# Altium PCB FoxSky.TractorVCU.PcbDoc
Units mm, origin at the board's own origin, x right, y up, seen from the top; angles counter-clockwise.
Board outline 79.93 x 48.25 mm, 2 copper layers (Top Layer, Bottom Layer); 109 components, 49 nets, 280 pads, 0 vias.
Unrouted connection lines stored in the file: 214.
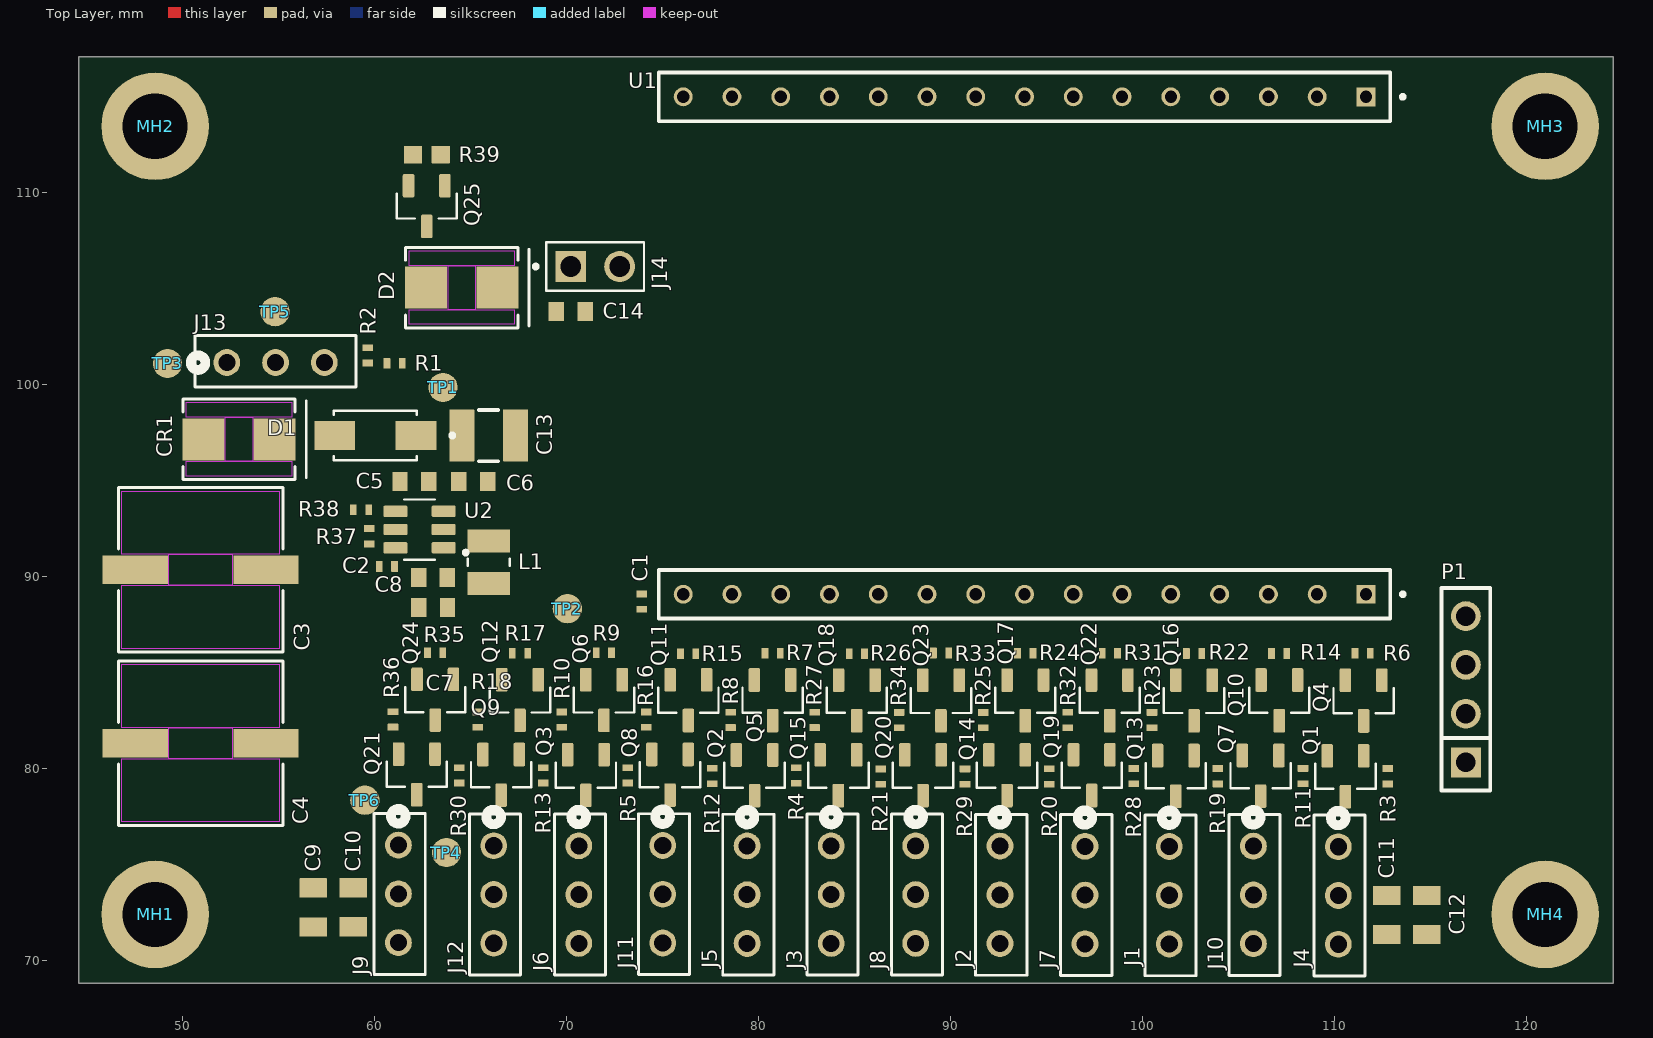
[diagram p0: Top Layer view]
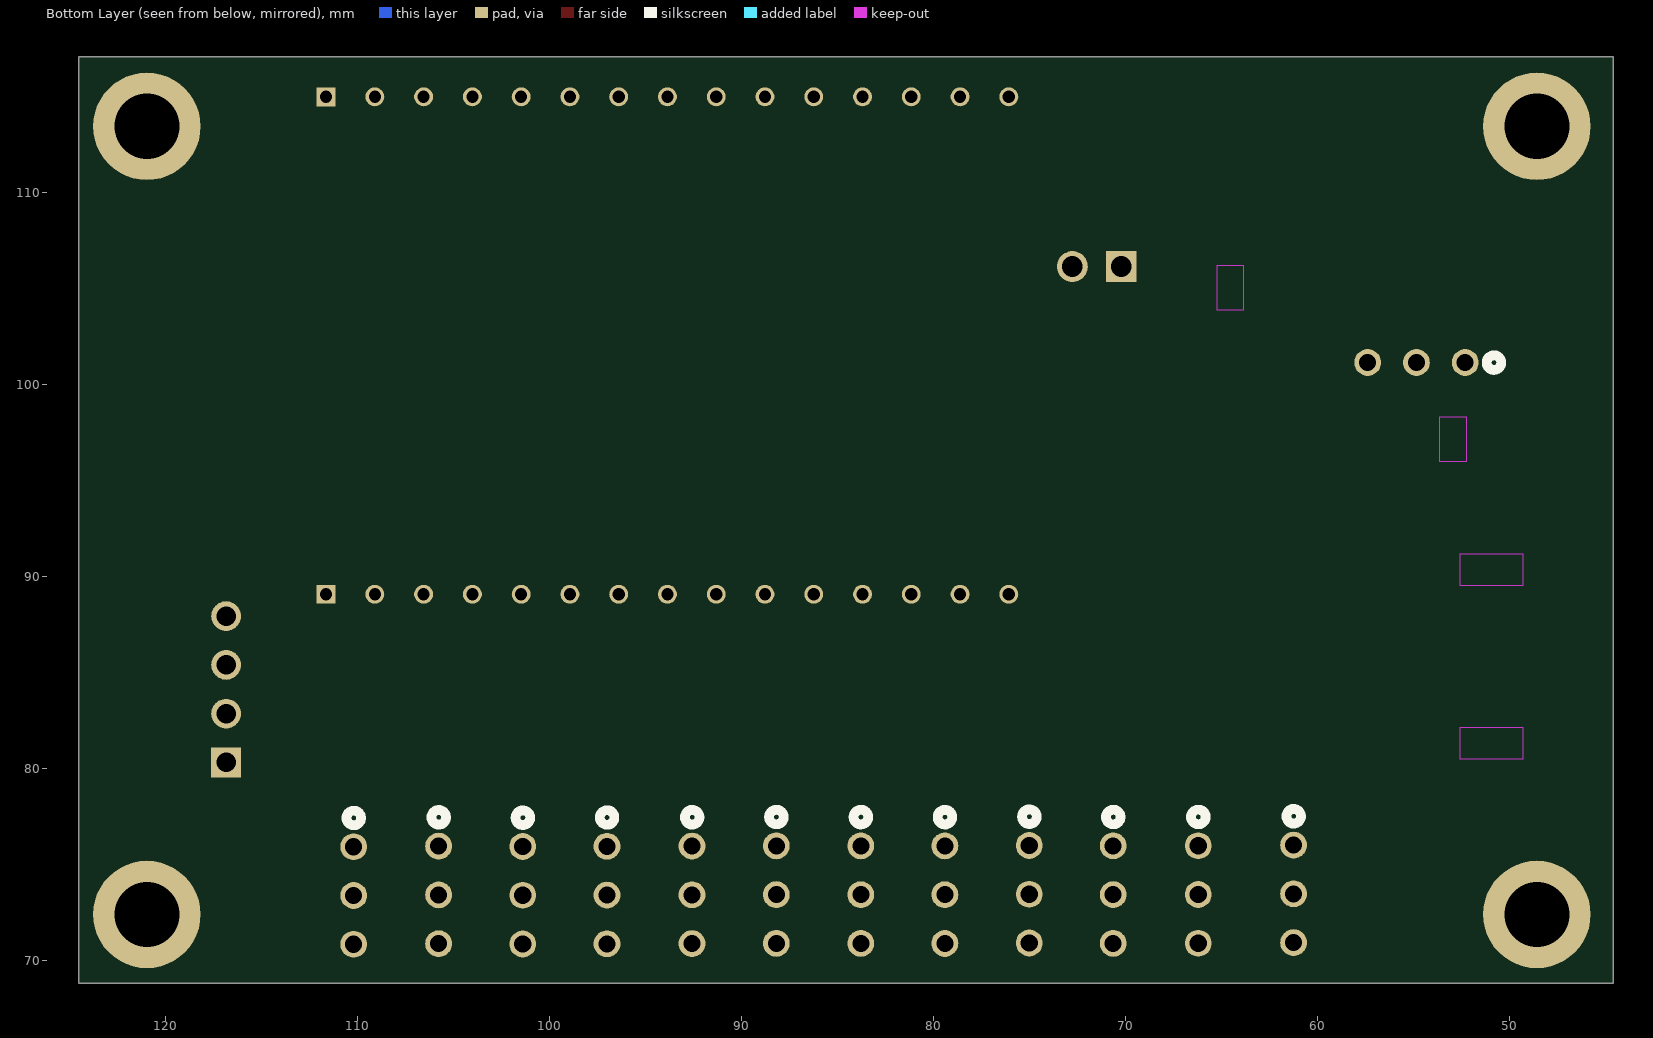
[diagram p1: Bottom Layer view, seen from below]

## Layer stack, top to bottom
Top Solder: solder mask 0.0102, Solder Resist, Dk 3.5
Top Layer: signal copper 0.0356
Dielectric 1: dielectric 0.32, FR-4, Dk 4.8
Bottom Layer: signal copper 0.0356
Bottom Solder: solder mask 0.0102, Solder Resist, Dk 3.5

## Board outline
44.6,68.8 44.6,117.05 124.525,117.05 124.525,68.8

## Design rules (kind name [scope] priority, off if disabled: settings)
Clearance [All] p1: gap=0.254 ignorepadtopadclearanceinfootprint=FALSE
PolygonConnect [All] p1: connectstyle=Relief reliefconductorwidth=0.254 reliefentries=4 polygonreliefangle="90 Angle" airgapwidth=0.254
RoutingVias [All] p1: holewidth=0.711 width=1.27 viastyle="Through Hole" minholewidth=0.711 minwidth=1.27 maxholewidth=0.711 maxwidth=1.27
SolderMaskExpansion [All] p1: expansion=0 istentingtop=FALSE
SupplyNets "Schematic Supply Nets_3" [InNet('+3V3')] p1: voltage=0.000
SupplyNets "Schematic Supply Nets_2" [InNet('+V_ESC')] p2: voltage=0.000
SupplyNets "Schematic Supply Nets_1" [InNet('GND')] p3: voltage=0.000
SupplyNets "Schematic Supply Nets" [InNet('+V_BUCK')] p4: voltage=0.000
Width [All] p1: maxlimit=0.254 minlimit=0.254 preferedwidth=0.254
30 further rules are at their usual default settings.

## Classes and differential pairs
component class Tractor2000: J1 J2 J3 J4 J5 J6 J7 J8 J9 J10 J11 J12 J13 MH1 MH2 MH3 MH4
component class Designator: Q1 Q2 Q3 Q4 Q5 Q6 Q7 Q8 Q9 Q10 Q11 Q12 Q13 Q14 Q15 Q16 Q17 Q18 Q19 Q20 Q21 Q22 Q23 Q24 R3 R4 R5 R6 R7 R8 R9 R10 R11 R12 R13 R14 R15 R16 R17 R18 R19 R20 R21 R22 R23 R24 R25 R26 R27 R28 R29 R30 R31 R32 R33 R34 R35 R36 TP1 TP2

## Components (designator, comment, footprint, x,y, rotation, side; value= is the part's Value field where it differs from the comment)
C1 "100n" C0402 73.925,88.675 r90 top
C2 "100n" C0402 60.65,90.5 r180 top
C3 "220u" CAP_PC_8X10_NCH 50.95,90.325 r180 top
C4 "220u" CAP_PC_8X10_NCH 50.95,81.296 r180 top
C5 "10u" C0603 62.085,94.927 r0 top
C6 "100n" C0603 65.15,94.925 r180 top
C7 "22u" C0603 63.057,88.362 r0 top
C8 "22u" C0603 63.05,89.925 r0 top
C9 "10u" C0805 56.816,72.746 r90 top
C10 "10u" C0805 58.9,72.75 r90 top
C11 "10u" C0805 112.728,72.349 r90 top
C12 "10u" C0805 114.809,72.346 r90 top
C13 "47u" C1210 65.95,97.325 r180 top
C14 "1u" C0603 70.225,103.775 r180 top
CR1 "SMBJ7.0A" SMBJSERIES_LTF 52.95,97.125 r180 top
D1 "SS14" DIOM4325X250N 60.05,97.325 r180 top
D2 "1N4148WT" SMBJSERIES_LTF 64.55,105.025 r180 top
J1 "HTSW-103-24-T-S" CON3_1X3_TU_TSW_SAI 101.4,73.375 r270 top
J2 "HTSW-103-24-T-S" CON3_1X3_TU_TSW_SAI 92.582,73.399 r270 top
J3 "HTSW-103-24-T-S" CON3_1X3_TU_TSW_SAI 83.791,73.407 r270 top
J4 "HTSW-103-24-T-S" CON3_1X3_TU_TSW_SAI 110.206,73.363 r270 top
J5 "HTSW-103-24-T-S" CON3_1X3_TU_TSW_SAI 79.413,73.405 r270 top
J6 "HTSW-103-24-T-S" CON3_1X3_TU_TSW_SAI 70.646,73.41 r270 top
J7 "HTSW-103-24-T-S" CON3_1X3_TU_TSW_SAI 97.012,73.386 r270 top
J8 "HTSW-103-24-T-S" CON3_1X3_TU_TSW_SAI 88.192,73.41 r270 top
J9 "HTSW-103-24-T-S" CON3_1X3_TU_TSW_SAI 61.25,73.45 r270 top
J10 "HTSW-103-24-T-S" CON3_1X3_TU_TSW_SAI 105.78,73.394 r270 top
J11 "HTSW-103-24-T-S" CON3_1X3_TU_TSW_SAI 75.016,73.429 r270 top
J12 "HTSW-103-24-T-S" CON3_1X3_TU_TSW_SAI 66.216,73.415 r270 top
J13 "HTSW-103-24-T-S" CON3_1X3_TU_TSW_SAI 54.85,101.125 r0 top
J14 "GoldPin 2x1" HARWIN_M20-9990246 71.5,106.125 r0 top
L1 "MAMK2520T3R3M" INDC2520X120N 65.95,90.725 r270 top
MH1 "M3 Plated Hole" "M3 Plated Hole" 48.575,72.375 r0 top
MH2 "M3 Plated Hole" "M3 Plated Hole" 48.575,113.425 r0 top
MH3 "M3 Plated Hole" "M3 Plated Hole" 120.975,113.425 r0 top
MH4 "M3 Plated Hole" "M3 Plated Hole" 120.975,72.375 r0 top
P1 "GoldPin 4x1" SMTC-TSW-104-08-X-S 116.85,80.295 r90 top
Q1 "AO3401" SOT95P240X111-3N 110.575,79.575 r270 top
Q2 "AO3401" SOT95P240X111-3N 79.799,79.623 r270 top
Q3 "AO3401" SOT95P240X111-3N 71.012,79.636 r270 top
Q4 "BSS138" SOT95P240X111-3N 111.525,83.515 r270 top
Q5 "BSS138" SOT95P240X111-3N 80.743,83.528 r270 top
Q6 "BSS138" SOT95P240X111-3N 71.955,83.546 r270 top
Q7 "AO3401" SOT95P240X111-3N 106.16,79.595 r270 top
Q8 "AO3401" SOT95P240X111-3N 75.4,79.65 r270 top
Q9 "AO3401" SOT95P240X111-3N 66.601,79.647 r270 top
Q10 "BSS138" SOT95P240X111-3N 107.13,83.526 r270 top
Q11 "BSS138" SOT95P240X111-3N 76.352,83.538 r270 top
Q12 "BSS138" SOT95P240X111-3N 67.583,83.544 r270 top
Q13 "AO3401" SOT95P240X111-3N 101.74,79.593 r270 top
Q14 "AO3401" SOT95P240X111-3N 92.95,79.625 r270 top
Q15 "AO3401" SOT95P240X111-3N 84.167,79.628 r270 top
Q16 "BSS138" SOT95P240X111-3N 102.692,83.52 r270 top
Q17 "BSS138" SOT95P240X111-3N 93.9,83.525 r270 top
Q18 "BSS138" SOT95P240X111-3N 85.126,83.524 r270 top
Q19 "AO3401" SOT95P240X111-3N 97.362,79.63 r270 top
Q20 "AO3401" SOT95P240X111-3N 88.577,79.626 r270 top
Q21 "AO3401" SOT95P240X111-3N 62.205,79.671 r270 top
Q22 "BSS138" SOT95P240X111-3N 98.3,83.525 r270 top
Q23 "BSS138" SOT95P240X111-3N 89.511,83.519 r270 top
Q24 "BSS138" SOT95P240X111-3N 63.167,83.56 r270 top
Q25 "BSS138" SOT95P240X111-3N 62.725,109.275 r270 top
R1 "1k" R0402 61.05,101.075 r180 top
R2 "10k" R0402 59.65,101.5 r270 top
R3 "2k2" R0402 112.775,79.575 r270 top
R4 "2k2" R0402 81.977,79.615 r270 top
R5 "2k2" R0402 73.204,79.618 r270 top
R6 "10k" R0402 111.475,85.975 r0 top
R7 "10k" R0402 80.744,85.973 r0 top
R8 "10k" R0402 78.549,82.508 r270 top
R9 "10k" R0402 71.953,85.998 r0 top
R10 "10k" R0402 69.767,82.524 r270 top
R11 "2k2" R0402 108.367,79.581 r270 top
R12 "2k2" R0402 77.597,79.584 r270 top
R13 "2k2" R0402 68.804,79.619 r270 top
R14 "10k" R0402 107.126,85.968 r0 top
R15 "10k" R0402 76.343,85.964 r0 top
R16 "10k" R0402 74.15,82.525 r270 top
R17 "10k" R0402 67.583,85.988 r0 top
R18 "10k" R0402 65.38,82.526 r270 top
R19 "2k2" R0402 103.936,79.576 r270 top
R20 "2k2" R0402 95.156,79.565 r270 top
R21 "2k2" R0402 86.367,79.552 r270 top
R22 "10k" R0402 102.693,85.967 r0 top
R23 "10k" R0402 100.5,82.5 r270 top
R24 "10k" R0402 93.899,85.978 r0 top
R25 "10k" R0402 91.706,82.499 r270 top
R26 "10k" R0402 85.127,85.965 r0 top
R27 "10k" R0402 82.925,82.509 r270 top
R28 "2k2" R0402 99.543,79.58 r270 top
R29 "2k2" R0402 90.76,79.556 r270 top
R30 "2k2" R0402 64.407,79.621 r270 top
R31 "10k" R0402 98.306,85.97 r0 top
R32 "10k" R0402 96.103,82.503 r270 top
R33 "10k" R0402 89.516,85.994 r0 top
R34 "10k" R0402 87.325,82.5 r270 top
R35 "10k" R0402 63.164,86.007 r0 top
R36 "10k" R0402 60.968,82.537 r270 top
R37 "33k" R0402 59.725,92.075 r270 top
R38 "10k" R0402 59.3,93.45 r0 top
R39 "10k" R0603 62.733,111.953 r0 top
TP1 "TP" TP 63.575,99.825 r0 top
TP2 "TP" TP 70.05,88.3 r90 top
TP3 "TP" TP 49.225,101.075 r90 top
TP4 "TP" TP 63.75,75.6 r90 top
TP5 "TP" TP 54.825,103.775 r90 top
TP6 "TP" TP 59.5,78.325 r90 top
U1 "NodeMCU-32" NODEMCU-32 92.325,101.625 r270 top
U2 "TPS562201DDCR" SOT95P280X110-6N 62.35,92.425 r180 top

## Footprints (in the part's own frame and the unit in brackets; to place one, negate y for a bottom-side part, rotate by r counter-clockwise, add the part's x,y. Pads: shape width x height; smd on the part's side, far side on the other; paste and mask are expansions set on the pad)
C0402 [mm] "Generic 0402 SMD Ceramic Capacitor Footprint"
  rrect5% 0.355x0.55 smd: 1(-0.4,0) 2(0.4,0)
  body extent -0.53,-0.28 0.53,0.28, height 0.55
C0603 [mm] "Generic 0603 SMD Ceramic Capacitor Footprint"
  rrect5% 0.8x1 smd: 1(-0.75,0) 2(0.75,0)
  body extent -0.87,-0.48 0.87,0.48, height 0.95
C0805 [mm] "Generic 0805 SMD Ceramic Capacitor Footprint"
  rrect5% 1x1.45 smd: 1(-1.016,0) 2(1.016,0)
  body extent -1.1,-0.72 1.1,0.72, height 1.45
C1210 [mm] "Generic 1210 SMD Ceramic Capcitor Footprint"
  rrect5% 1.3x2.7 smd: 1(-1.4,0) 2(1.4,0)
  silkscreen extent -0.5,-1.33 0.5,1.34, body extent -1.7,-1.35 1.7,1.35, height 2.8
CAP_PC_8X10_NCH [mil]
  rect 134x59 smd paste+0 mask+0: 1(-134,0) 2(134,0)
  Top Layer keep-out region: -161.5,-161.5 -161.5,-31.5 161.5,-31.5 161.5,-161.5
  Top Layer keep-out region: -161.5,31.5 -161.5,161.5 161.5,161.5 161.5,31.5
  Top Layer keep-out region: -65,-31.5 -65,31.5 65,31.5 65,-31.5
  Keep-Out Layer region: -65,-31.5 -65,31.5 65,31.5 65,-31.5
  silkscreen extent -169,-169 169,169, body extent -181,-164 181,164, height 396
CON3_1X3_TU_TSW_SAI [mil]
  round 55 hole 35 paste-99999 mask+0: 1(-100,0) 2(0,0) 3(100,0)
  silkscreen extent -174,-50 165,55, body extent -150,-50 150,50, height 500
DIOM4325X250N [mm]
  rect 2.12x1.5 smd paste+0 mask+0.102: A(2.115,0) C(-2.115,0)
  silkscreen extent -4.1,-1.28 2.16,1.28, body extent -2.56,-1.36 2.49,1.34, height 2.37
HARWIN_M20-9990246 [mm]
  rect 1.605x1.605 / inner round 1.605 / far side rect 1.605x1.605 hole 1.07: 1(-1.27,0)
  round 1.605 hole 1.07: 2(1.27,0)
  silkscreen extent -3.2,-1.27 2.54,1.27, body extent -2.54,-1.27 2.54,1.27, height 8.74
INDC2520X120N [mm]
  rect 1.2x2.22 smd: 1(-1.11,0) 2(1.11,0)
  silkscreen extent -0.19,-1.1 0.19,1.1, body extent -1.25,-1 1.25,1, height 1.2
"M3 Plated Hole" [mm]
  round 5.6 hole 3.4 mask+0: 1(0,0)
NODEMCU-32 [mm]
  rect 0.985x0.985 / inner round 0.985 / far side rect 0.985x0.985 hole 0.635: 01(-13.339,19.318) 16(12.571,19.318)
  round 0.985 hole 0.635: 02(-13.339,16.778) 03(-13.339,14.238) 04(-13.339,11.698) 05(-13.339,9.158) 06(-13.339,6.618) 07(-13.339,4.078) 08(-13.339,1.538) 09(-13.339,-1.002) 10(-13.339,-3.542) 11(-13.339,-6.082) 12(-13.339,-8.622) 13(-13.339,-11.162) 14(-13.339,-13.702) 15(-13.339,-16.242) 17(12.571,16.778) 18(12.571,14.238) 19(12.571,11.698) 20(12.571,9.158) 21(12.571,6.618) 22(12.571,4.078) 23(12.571,1.538) 24(12.571,-1.002) 25(12.571,-3.542) 26(12.571,-6.082) 27(12.571,-8.622) 28(12.571,-11.162) 29(12.571,-13.702) 30(12.571,-16.242)
  silkscreen extent -14.61,-17.51 13.84,21.34
R0402 [mm] "Generic 0402 Resistor Footprint"
  rrect5% 0.35x0.55 smd: 1(-0.4,0) 2(0.4,0)
  body extent -0.53,-0.28 0.53,0.28, height 0.37
R0603 [mm] "Generic 0603 Resistor Footprint"
  rrect5% 0.95x0.9 smd: 1(-0.725,0) 2(0.725,0)
  body extent -0.85,-0.45 0.85,0.45, height 0.55
SMBJSERIES_LTF [mil]
  rect 86x86 smd paste+0 mask+0: 1(-73,0) 2(73,0)
  Top Layer keep-out region: -108,-75.5 -108,-45 108,-45 108,-75.5
  Top Layer keep-out region: -108,45 -108,75.5 108,75.5 108,45
  Top Layer keep-out region: -28,-45 -28,45 28,45 28,-45
  Keep-Out Layer region: -28,-45 -28,45 28,45 28,-45
  silkscreen extent -138,-83 115,83, body extent -110,-77 110,77, height 98
SMTC-TSW-104-08-X-S [mm] ".025 SQ Post Terminal Strip Assembly, 1x4 Pins, Vertical, 2.54mm Pitch, Male"
  rect 1.55x1.55 hole 1.02: 1(0,0)
  round 1.55 hole 1.02: 2(2.54,0) 3(5.08,0) 4(7.62,0)
  silkscreen extent -1.46,-1.27 9.08,1.27, body extent -1.27,-1.27 8.89,1.27, height 8.38
SOT95P240X111-3N [mm]
  rrect25% 1.23x0.6 smd: 1(-1.06,0.95) 2(-1.06,-0.95) 3(1.06,0)
  silkscreen extent -0.65,-1.57 0.65,1.57, body extent -1.2,-1.45 1.2,1.45, height 1.11
SOT95P280X110-6N [mm]
  rrect25% 1.25x0.59 smd: 1(-1.255,0.95) 2(-1.255,0) 3(-1.255,-0.95) 4(1.255,-0.95) 5(1.255,0) 6(1.255,0.95)
  silkscreen extent -2.5,-1.57 0.8,1.57, body extent -1.4,-1.45 1.4,1.45, height 1.1
TP [mil]
  round 60 smd: 1(0,0)

## Part data
C1 C2: library part CMP-00023-15, "Generic SMD 0402 Ceramic Capacitor"
C3 C4: library part PCJ1C221MCL4GS, "No Description Available", Manufacturer_Name=Nichicon, Copyright="Copyright (C) 2026 Ultra Librarian. All rights reserved.", Manufacturer_Part_Number=PCJ1C221MCL4GS
C5 C6 C7 C8 C14: library part CMP-00024-8, "Generic 0603 SMD Ceramic Capacitor"
C9 C10 C11 C12: library part CMP-00025-5, "Generic 0805 SMD Ceramic Capacitor"
C13: library part CMP-00027-6, "Generic 1210 SMD Ceramic Capacitor"
CR1: "Description", Manufacturer_Name="Littelfuse Inc", Copyright="Copyright (C) 2025 Ultra Librarian. All rights reserved.", Manufacturer_Part_Number=SMBJ7.0A
D1: "1A, 40V, Schottky Rectifier", Package="SMA-2 Taiwan Semiconductor", Check_prices=https://www.snapeda.com/parts/SS14/taiwan/view-part/?ref=eda, MF="Taiwan Semiconductor", MP=SS14, SnapEDA_Link=https://www.snapeda.com/parts/SS14/taiwan/view-part/?ref=snap
D2: "Description", Manufacturer_Name="Littelfuse Inc", Manufacturer_Part_Number=SMBJ7.0A, Copyright="Copyright (C) 2025 Ultra Librarian. All rights reserved."
J1 J2 J3 J4 J5 J6 J7 J8 J9 J10 J11 J12 J13: "Description", Manufacturer_Name="Samtec Inc", Copyright="Copyright (C) 2026 Ultra Librarian. All rights reserved.", Manufacturer_Part_Number=HTSW-103-24-T-S, RefDes=RefDes, Type=Type
J14: "2.54mm (0.1) Pitch SIL Vertical Throughboard Pin Header, 6.1mm mating pin height, tin, 2 contacts", Package=None, Check_prices=https://www.snapeda.com/parts/M20-9990246/Harwin/view-part/?ref=eda, MF=Harwin, MP=M20-9990246, SnapEDA_Link=https://www.snapeda.com/parts/M20-9990246/Harwin/view-part/?ref=snap
L1: "3.3 ÂµH Shielded Drum Core, Wirewound Inductor 1.7 A 156mOhm Max 1008 (2520 Metric)", Package="2520 Taiyo Yuden", Check_prices=https://www.snapeda.com/parts/MAMK2520T3R3M/Taiyo+Yuden/view-part/?ref=eda, MF="Taiyo Yuden", MP=MAMK2520T3R3M, SnapEDA_Link=https://www.snapeda.com/parts/MAMK2520T3R3M/Taiyo+Yuden/view-part/?ref=snap
MH1 MH2 MH3 MH4: library part CONN-00039-2
P1: library part CMP-00067-4, "TSW - Samtec 2.54mm Pin Header 13.46mm Overall Pin Length 5.08mm Tail (08) (mcv)(TO22)", Manufacturer=Molex
Q1 Q2 Q3 Q7 Q8 Q9 Q13 Q14 Q15 Q19 Q20 Q21: "P-Channel 30 V 4A Surface Mount SOT-23-3", Package="SOT-23-3 ON Semiconductor", Check_prices=https://www.snapeda.com/parts/BSS138/Onsemi/view-part/?ref=eda, MF=onsemi, MP=BSS138, SnapEDA_Link=https://www.snapeda.com/parts/BSS138/Onsemi/view-part/?ref=snap
Q4 Q5 Q6 Q10 Q11 Q12 Q16 Q17 Q18 Q22 Q23 Q24 Q25: "N-Channel 50 V 220mA (Ta) 350mW (Ta) Surface Mount SOT-23-3", Package="SOT-23-3 ON Semiconductor", Check_prices=https://www.snapeda.com/parts/BSS138/Onsemi/view-part/?ref=eda, MF=onsemi, MP=BSS138, SnapEDA_Link=https://www.snapeda.com/parts/BSS138/Onsemi/view-part/?ref=snap
R1 R2 R3 R4 R5 R6 R7 R8 R9 R10 R11 R12 R13 R14 R15 R16 R17 R18 R19 R20 R21 R22 R23 R24 R25 R26 R27 R28 R29 R30 R31 R32 R33 R34 R35 R36 R37 R38: library part CMP-00016-11, "Generic 0402 SMD Resistor"
R39: library part CMP-00017-10, "Generic 0603 SMD Resistor"
U1: Package=None, Availability=Unavailable, MF="Samtec Inc.", MP=TS-115-T-A, Price=None
U2: "4.5 V to 17 V input, 2 A output, synchronous step-down converter in Eco-mode", Package="SOT-23-THN-6 Texas Instruments", Check_prices=https://www.snapeda.com/parts/TPS562201DDCR/Texas+Instruments/view-part/?ref=eda, MF="Texas Instruments", MP=TPS562201DDCR, SnapEDA_Link=https://www.snapeda.com/parts/TPS562201DDCR/Texas+Instruments/view-part/?ref=snap

## Nets (pads, with @x,y where several pads share a name; then routed paths per layer and width w, separated by ;. In a path a pad name is that pad's centre, name@x,y a point inside that pad or via, vN(x,y) a via of type N, cw(c..) or ccw(c..) an arc to the next point about the centre after c; other vN are vias at no path point)
+3V3: C1.2 C7.2 C8.2 C14.2 D2.1 J14.1 L1.2 P1.4 R37.2 U1.30
+V_BUCK: C5.2 C6.2 C13.2 D1.C U2.3 U2.5
+V_ESC: C3.1 C4.1 C9.2 C10.2 C11.2 C12.2 CR1.1 D1.A J1.2 J2.2 J3.2 J4.2 J5.2 J6.2 J7.2 J8.2 J9.2 J10.2 J11.2 J12.2 J13.2 Q1.3 Q2.3 Q3.3 Q7.3 Q8.3 Q9.3 Q13.3 Q14.3 Q15.3 Q19.3 Q20.3 Q21.3 R3.2 R4.2 R5.2 R11.2 R12.2 R13.2 R19.2 R20.2 R21.2 R28.2 R29.2 R30.2
BACK_LIGHT: J10.1 Q7.2
BUZZER: Q25.1 R39.2 U1.13
FRONT_LIGHT: J4.1 Q1.2
GND: C1.1 C3.2 C4.2 C5.1 C6.1 C7.1 C8.1 C9.1 C10.1 C11.1 C12.1 C13.1 C14.1 CR1.2 J1.3 J2.3 J3.3 J4.3 J5.3 J6.3 J7.3 J8.3 J9.3 J10.3 J11.3 J12.3 J13.1 MH1.1 MH2.1 MH3.1 MH4.1 P1.1 Q4.2 Q5.2 Q6.2 Q10.2 Q11.2 Q12.2 Q16.2 Q17.2 Q18.2 Q22.2 Q23.2 Q24.2 Q25.2 R2.1 R6.1 R7.1 R8.1 R9.1 R10.1 R14.1 R15.1 R16.1 R17.1 R18.1 R22.1 R23.1 R24.1 R25.1 R26.1 R27.1 R31.1 R32.1 R33.1 R34.1 R35.1 R36.1 R38.1 R39.1 U1.14 U1.29 U2.1
MCU_ESC_CONTROL: R1.1 U1.10
NetC2_1: C2.1 L1.1 U2.2
NetC2_2: C2.2 U2.6
NetD2_2: D2.2 J14.2 Q25.3
NetJ13_3: J13.3 R1.2 R2.2
NetQ1_1: Q1.1 Q4.3 R3.1
NetQ2_1: Q2.1 Q5.3 R4.1
NetQ3_1: Q3.1 Q6.3 R5.1
NetQ4_1: Q4.1 R6.2 U1.16
NetQ5_1: Q5.1 R7.2 U1.26
NetQ6_1: Q6.1 R9.2 U1.07
NetQ7_1: Q7.1 Q10.3 R11.1
NetQ8_1: Q8.1 Q11.3 R12.1
NetQ9_1: Q9.1 Q12.3 R13.1
NetQ10_1: Q10.1 R14.2 U1.17
NetQ11_1: Q11.1 R15.2 U1.06
NetQ12_1: Q12.1 R17.2 U1.08
NetQ13_1: Q13.1 Q16.3 R19.1
NetQ14_1: Q14.1 Q17.3 R20.1
NetQ15_1: Q15.1 Q18.3 R21.1
NetQ16_1: Q16.1 R22.2 U1.20
NetQ17_1: Q17.1 R24.2 U1.22
NetQ18_1: Q18.1 R26.2 U1.25
NetQ19_1: Q19.1 Q22.3 R28.1
NetQ20_1: Q20.1 Q23.3 R29.1
NetQ21_1: Q21.1 Q24.3 R30.1
NetQ22_1: Q22.1 R31.2 U1.21
NetQ23_1: Q23.1 R33.2 U1.24
NetQ24_1: Q24.1 R35.2 U1.09
NetR37_1: R37.1 R38.2 U2.4
PWM_GPIO1: J5.1 Q2.2 R8.2
PWM_GPIO2: J11.1 Q8.2 R16.2
PWM_GPIO3: J6.1 Q3.2 R10.2
PWM_GPIO4: J12.1 Q9.2 R18.2
PWM_SERVO1: J1.1 Q13.2 R23.2
PWM_SERVO2: J7.1 Q19.2 R32.2
PWM_SERVO3: J2.1 Q14.2 R25.2
PWM_SERVO4: J8.1 Q20.2 R34.2
PWM_SERVO5: J3.1 Q15.2 R27.2
PWM_SERVO6: J9.1 Q21.2 R36.2
UART_RX: P1.2 U1.18
UART_TX: P1.3 U1.19
pads on no net: TP1.1 TP2.1 TP3.1 TP4.1 TP5.1 TP6.1 U1.01 U1.02 U1.03 U1.04 U1.05 U1.11 U1.12 U1.15 U1.23 U1.27 U1.28

## Silkscreen, mask and mechanical layers (free items; w line width, h text height)
Mechanical 1:
  the board outline again, w0.254